# EAGLE board order2 (EAGLE 5.06), part 1 of 3
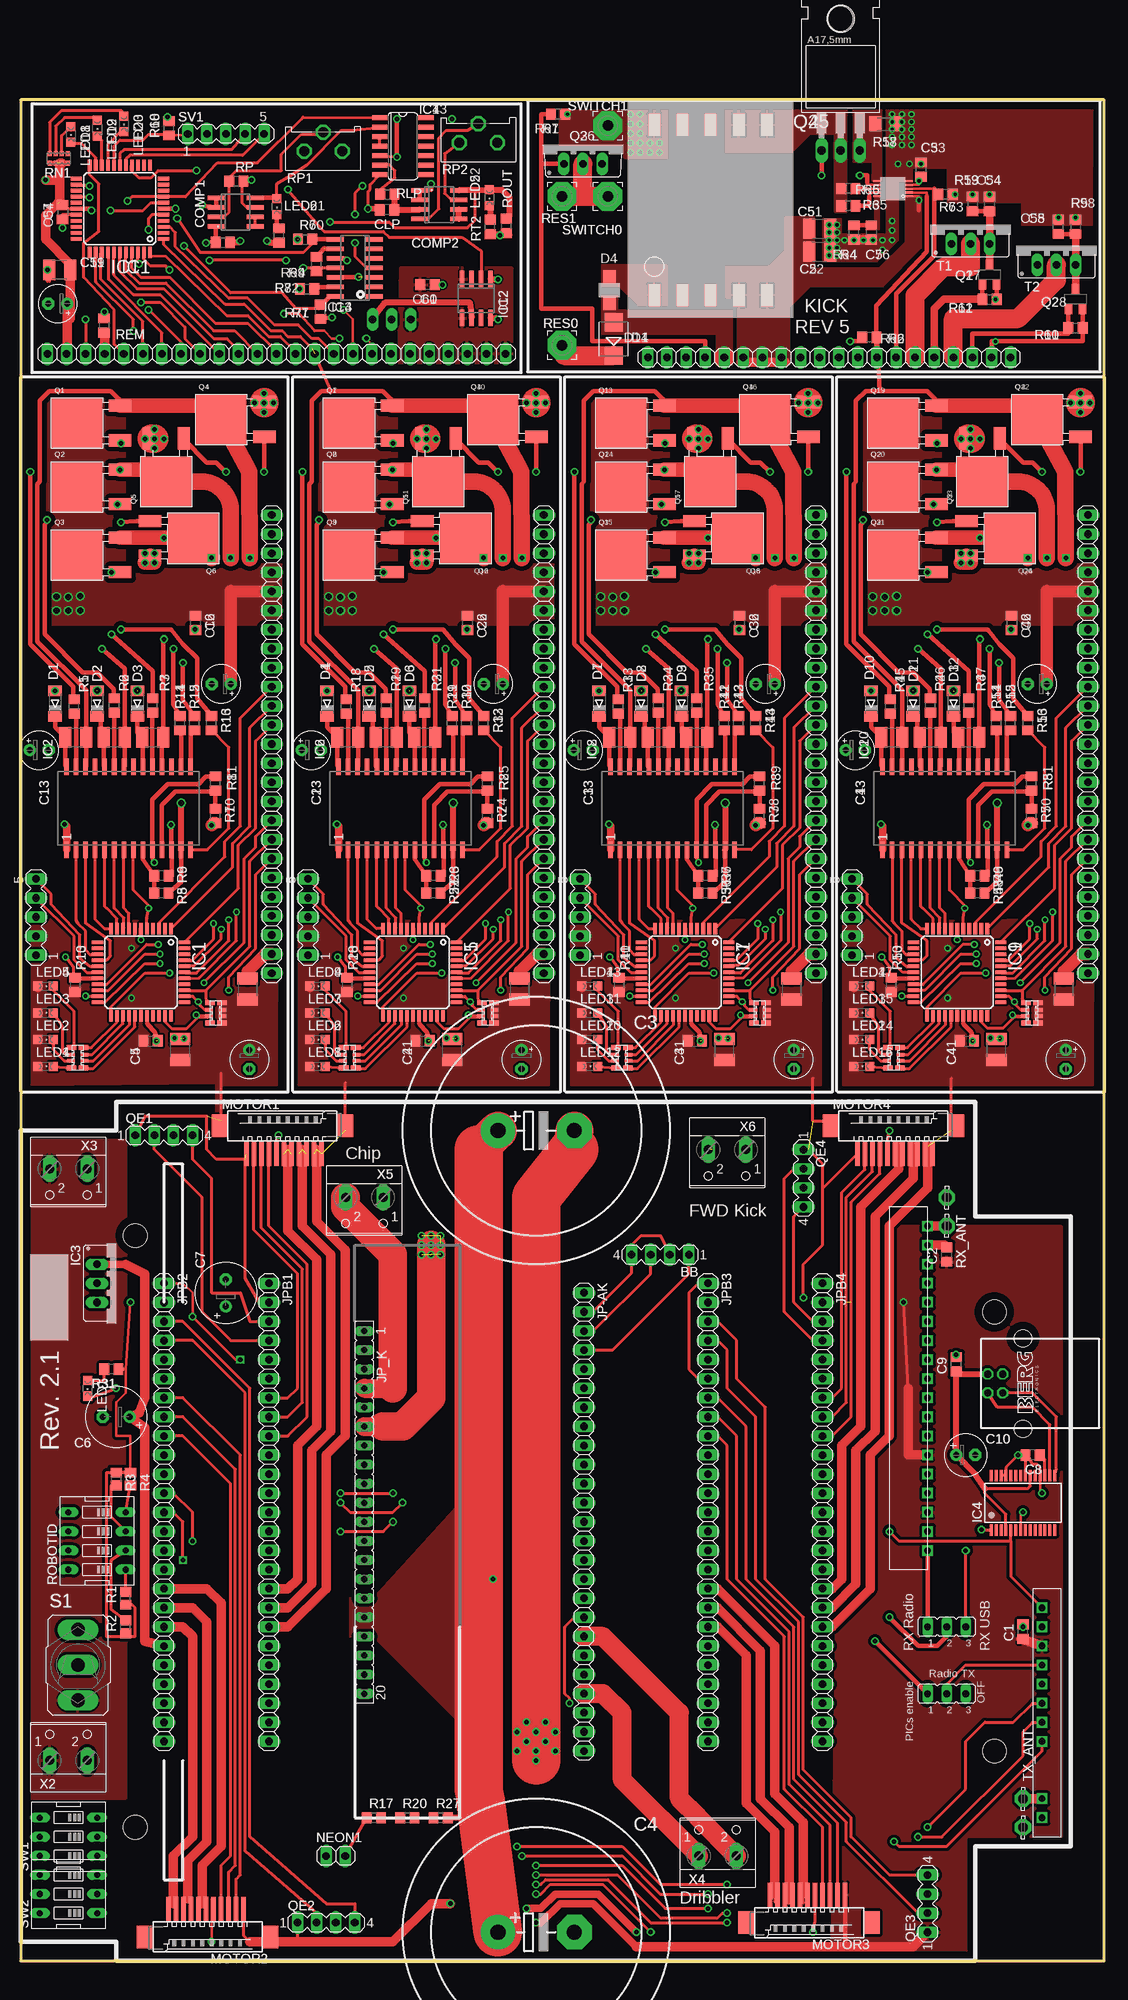
[diagram p0: board, top side]
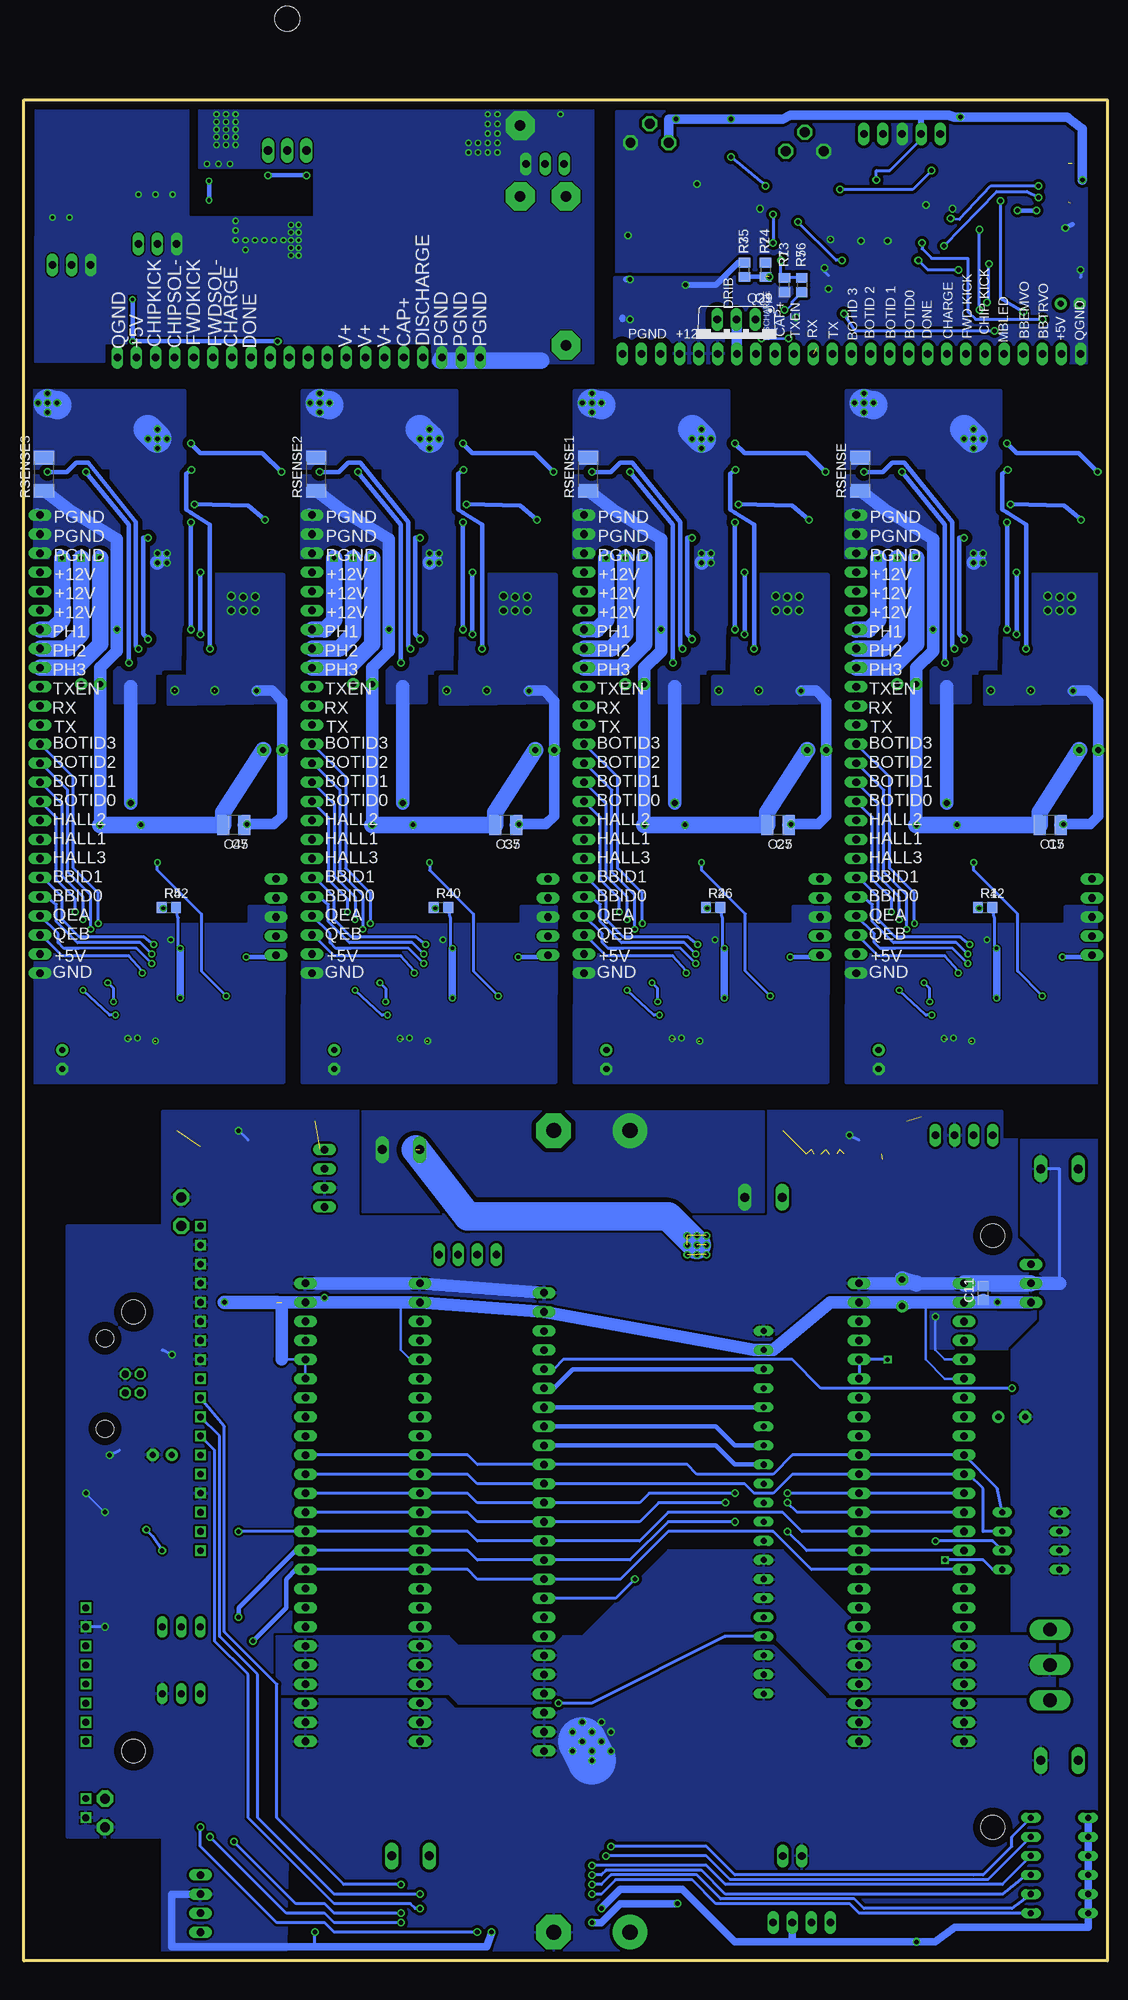
[diagram p1: board, bottom side, seen from below]

Size 144.15 x 247.65 mm. Coordinates in mm from the lower left corner, seen from the top.
Outline: 0,0 144.15,0 144.15,247.65 0,247.65 0,0
Copper layers (1*16): Top 0.035mm / dielectric 1.5mm / Bottom 0.035mm
Design rules "default": minimum track width 10mil, minimum drill 24mil, track to track 8mil, track to pad 8mil, pad to pad 8mil, via to via 8mil, smd to smd 8mil, copper to edge 40mil, drill to drill 8mil, minimum pad ring 10mil, minimum via ring 8mil, stop-mask expansion 4mil, vias tented up to drill 0mil, thermal gap 10mil
Holes 3.17 mm at 129.54,86.36 129.54,27.94 15.24,17.78 15.24,96.52

## Footprints (pad centres in the part's own frame; a part is rotated, then mirrored left to right if it is on the bottom)
MA04-1 = drill 1.016 long: 1 -3.81,0; 2 -1.27,0; 3 1.27,0; 4 3.81,0
C0805 = smd 1.3 x 1.5: 1 -0.95,0; 2 0.95,0
EB35D = drill 2.007 pad 4.597 round: + -5.08,0 | drill 2.007 pad 4.597 octagon: - 5.08,0
E3,5-8 = drill 0.813 pad 1.6 round: + -1.778,0 | drill 0.813 pad 1.6 octagon: - 1.778,0
E2,5-6 = drill 0.813 pad 1.6 round: + -1.27,0 | drill 0.813 pad 1.6 octagon: - 1.27,0
E2,5-5 = drill 0.813 pad 1.6 round: + -1.27,0 | drill 0.813 pad 1.6 octagon: - 1.27,0
C1210 = smd 1.6 x 2.7: 1 -1.4,0; 2 1.4,0
SOIC8 = smd 0.6 x 2.2: 1 -1.905,-2.6; 2 -0.635,-2.6; 3 0.635,-2.6; 4 1.905,-2.6; 5 1.905,2.6; 6 0.635,2.6; 7 -0.635,2.6; 8 -1.905,2.6
MINIMELF = smd 1.4 x 1.8: A 1.7,0; C -1.7,0
SMA = smd 1.7 x 1.7: P$1 -1.79,0; P$2 1.79,0
SMB = smd 2.4 x 2.4: A 2.2,0; C -2.2,0
TQFP44@1 = smd 1.5 x 0.5: 1 -5.8,4; 2 -5.8,3.2; 3 -5.8,2.4; 4 -5.8,1.6; 5 -5.8,0.8; 6 -5.8,0; 7 -5.8,-0.8; 8 -5.8,-1.6; 9 -5.8,-2.4; 10 -5.8,-3.2; 11 -5.8,-4; 23 5.8,-4; 24 5.8,-3.2; 25 5.8,-2.4; 26 5.8,-1.6; 27 5.8,-0.8; 28 5.8,0; 29 5.8,0.8; 30 5.8,1.6; 31 5.8,2.4; 32 5.8,3.2; 33 5.8,4 | smd 0.5 x 1.5: 12 -4,-5.8; 13 -3.2,-5.8; 14 -2.4,-5.8; 15 -1.6,-5.8; 16 -0.8,-5.8; 17 0,-5.8; 18 0.8,-5.8; 19 1.6,-5.8; 20 2.4,-5.8; 21 3.2,-5.8; 22 4,-5.8; 34 4,5.8; 35 3.2,5.8; 36 2.4,5.8; 37 1.6,5.8; 38 0.8,5.8; 39 0,5.8; 40 -0.8,5.8; 41 -1.6,5.8; 42 -2.4,5.8; 43 -3.2,5.8; 44 -4,5.8
SOP28 = smd 0.6 x 2.2: 1 -8.255,-5.5; 2 -6.985,-5.5; 3 -5.715,-5.5; 4 -4.445,-5.5; 5 -3.175,-5.5; 6 -1.905,-5.5; 7 -0.635,-5.5; 8 0.635,-5.5; 9 1.905,-5.5; 10 3.175,-5.5; 11 4.445,-5.5; 12 5.715,-5.5; 13 6.985,-5.5; 14 8.255,-5.5; 15 8.255,5.5; 16 6.985,5.5; 17 5.715,5.5; 18 4.445,5.5; 19 3.175,5.5; 20 1.905,5.5; 21 0.635,5.5; 22 -0.635,5.5; 23 -1.905,5.5; 24 -3.175,5.5; 25 -4.445,5.5; 26 -5.715,5.5; 27 -6.985,5.5; 28 -8.255,5.5
78XXS = drill 1.016 long: GND 0,-2.54; IN -2.54,-2.54; OUT 2.54,-2.54
SSOP28 = smd 0.4 x 1.5: 1 -4.225,-3.625; 2 -3.575,-3.625; 3 -2.925,-3.625; 4 -2.275,-3.625; 5 -1.625,-3.625; 6 -0.975,-3.625; 7 -0.325,-3.625; 8 0.325,-3.625; 9 0.975,-3.625; 10 1.625,-3.625; 11 2.275,-3.625; 12 2.925,-3.625; 13 3.575,-3.625; 14 4.225,-3.625; 15 4.225,3.625; 16 3.575,3.625; 17 2.925,3.625; 18 2.275,3.625; 19 1.625,3.625; 20 0.975,3.625; 21 0.325,3.625; 22 -0.325,3.625; 23 -0.975,3.625; 24 -1.625,3.625; 25 -2.275,3.625; 26 -2.925,3.625; 27 -3.575,3.625; 28 -4.225,3.625
SO-08 = smd 0.6 x 2.2: 1 -1.905,-2.6; 2 -0.635,-2.6; 3 0.635,-2.6; 4 1.905,-2.6; 5 1.905,2.6; 6 0.635,2.6; 7 -0.635,2.6; 8 -1.905,2.6
SO14 = smd 0.66 x 2.032: 1 -3.81,-3.073; 2 -2.54,-3.073; 3 -1.27,-3.073; 4 0,-3.073; 5 1.27,-3.073; 6 2.54,-3.073; 7 3.81,-3.073; 8 3.81,3.073; 9 2.54,3.073; 10 1.27,3.073; 11 0,3.073; 12 -1.27,3.073; 13 -2.54,3.073; 14 -3.81,3.073
SO14' = smd 0.6 x 2.2: 1 -3.81,-2.6; 2 -2.54,-2.6; 3 -1.27,-2.6; 4 0,-2.6; 5 1.27,-2.6; 6 2.54,-2.6; 7 3.81,-2.6; 8 3.81,2.6; 9 2.54,2.6; 10 1.27,2.6; 11 0,2.6; 12 -1.27,2.6; 13 -2.54,2.6; 14 -3.81,2.6
MA05-1 = drill 1.016 long: 1 -5.08,0; 2 -2.54,0; 3 0,0; 4 2.54,0; 5 5.08,0
JP2 = drill 0.914 long: 1 -2.54,0; 2 0,0; 3 2.54,0
1X25 = drill 1.016 long: 1 -29.21,0; 2 -26.67,0; 3 -24.13,0; 4 -21.59,0; 5 -19.05,0; 6 -16.51,0; 7 -13.97,0; 8 -11.43,0; 9 -8.89,0; 10 -6.35,0; 11 -3.81,0; 12 -1.27,0; 13 1.27,0; 14 3.81,0; 15 6.35,0; 16 8.89,0; 17 11.43,0; 18 13.97,0; 19 16.51,0; 20 19.05,0; 21 21.59,0; 22 24.13,0; 23 26.67,0; 24 29.21,0; 25 31.75,0
FE20 = drill 0.813 long: 1 -24.13,0; 2 -21.59,0; 3 -19.05,0; 4 -16.51,0; 5 -13.97,0; 6 -11.43,0; 7 -8.89,0; 8 -6.35,0; 9 -3.81,0; 10 -1.27,0; 11 1.27,0; 12 3.81,0; 13 6.35,0; 14 8.89,0; 15 11.43,0; 16 13.97,0; 17 16.51,0; 18 19.05,0; 19 21.59,0; 20 24.13,0
1X20 = drill 1.016 long: 1 -24.13,0; 2 -21.59,0; 3 -19.05,0; 4 -16.51,0; 5 -13.97,0; 6 -11.43,0; 7 -8.89,0; 8 -6.35,0; 9 -3.81,0; 10 -1.27,0; 11 1.27,0; 12 3.81,0; 13 6.35,0; 14 8.89,0; 15 11.43,0; 16 13.97,0; 17 16.51,0; 18 19.05,0; 19 21.59,0; 20 24.13,0
R3225 = smd 1.6 x 2.7: 1 -1.4,0; 2 1.4,0
CHIPLED_0805 = smd 1.2 x 1.2: A 0,-1.05; C 0,1.05
53261-11 = smd 0.6 x 3.2: P$1 -3,-3.1; P$2 -2,-3.1; P$3 -1,-3.1; P$4 0,-3.1; P$5 1,-3.1; P$6 2,-3.1; P$7 3,-3.1; P$8 4,-3.1; P$9 5,-3.1; P$10 6,-3.1; P$11 7,-3.1 | smd 2.1 x 3: S1 10.15,0.625; S2 -6.55,0.625
1X02 = drill 1.016 long: 1 -1.27,0; 2 1.27,0
DPAK = smd 6.7 x 6.7: DRAIN 0,0 | smd 3 x 1.6: GATE 5.75,-2.3; SOURCE 5.75,2.3
TO220 = drill 1.118 long: 1 -2.54,-6.35; 2 0,-6.35; 3 2.54,-6.35 | hole 3.302: 0,11.176
TO220BV = drill 1.016 long: D 0,-2.54; G -2.54,-2.54; S 2.54,-2.54
SOT23W = smd 1 x 1.4: 1 -0.95,-1.303; 2 0.95,-1.303; 3 0,1.303
R0805 = smd 1.3 x 1.5: 1 -0.85,0; 2 0.85,0
R0805' = smd 1.3 x 1.5: 1 -0.95,0; 2 0.95,0
M1206 = smd 1.6 x 2: 1 -1.4,0; 2 1.4,0
3,81/1,4 = drill 1.397 pad 3.81 octagon: 1 0,0
0603-ARC = smd 0.5 x 0.65: 1 -1.2,-0.625; 2 -0.4,-0.625; 3 0.4,-0.625; 4 1.2,-0.625; 5 1.2,0.625; 6 0.4,0.625; 7 -0.4,0.625; 8 -1.2,0.625
EDG-04 = drill 0.813 long: 1 -3.81,-3.81; 2 -1.27,-3.81; 3 1.27,-3.81; 4 3.81,-3.81; 5 3.81,3.81; 6 1.27,3.81; 7 -1.27,3.81; 8 -3.81,3.81
ECP10P = drill 1.321 octagon: A -2.54,0; E 2.54,0; S 0,2.54
R2010 = smd 1.8 x 2.7: 1 -2.2,0; 2 2.2,0
LSP13 = drill 1.321 pad 2.159 octagon: MP 0,0
M9040P = drill 1.803 long: 1 0,4.699; 2 0,0; 3 0,-4.699
EDG-03 = drill 0.813 long: 1 -2.54,-3.81; 2 0,-3.81; 3 2.54,-3.81; 4 2.54,3.81; 5 0,3.81; 6 -2.54,3.81
TO220CS = drill 1.016 long: A 0,-2.54; C -2.54,-2.54; G 2.54,-2.54
SIP-18 = drill 0.9 square: P$1 2.54,0; P$2 5.08,0; P$3 7.62,0; P$4 10.16,0; P$5 12.7,0; P$6 15.24,0; P$7 17.78,0; P$8 20.32,0; P$9 22.86,0; P$10 25.4,0; P$11 27.94,0; P$12 30.48,0; P$13 33.02,0; P$14 35.56,0; P$15 38.1,0; P$16 40.64,0; P$17 43.18,0; P$18 45.72,0
SIP-10 = drill 0.9 square: P$1 2.54,0; P$2 5.08,0; P$3 12.7,0; P$4 15.24,0; P$5 17.78,0; P$6 20.32,0; P$7 22.86,0; P$8 25.4,0; P$9 27.94,0; P$10 30.48,0
0603X4 = smd 0.508 x 1.016: P$1 1.2,-0.1; P$2 2,-0.1; P$3 2,1.7; P$4 1.2,1.7 | smd 0.635 x 1.27: P$5 0.25,0; P$6 0.25,1.6; P$7 2.95,0; P$8 2.95,1.6
10-MSOP = smd 0.97 x 0.31: P$1 -0.485,-0.155; P$2 -0.485,-0.655; P$3 -0.485,-1.155; P$4 -0.485,-1.655; P$5 -0.485,-2.155; P$6 3.785,-2.155; P$7 3.785,-1.655; P$8 3.785,-1.155; P$9 3.785,-0.655; P$10 3.785,-0.155
10-TRANSFORMER = smd 2.92 x 1.52: P$1 0,0; P$2 0,-3.75; P$3 0,-7.5; P$4 0,-11.25; P$5 0,-15; P$6 22.67,-15; P$7 22.67,-11.25; P$8 22.67,-7.5; P$9 22.67,-3.75; P$10 22.67,0
PN61729 = drill 0.95 octagon: 1 1.25,4.71; 2 -1.25,4.71; 3 -1.25,2.71; 4 1.25,2.71 | hole 2.3: -6.02,0; 6.02,0
W237-102 = drill 1.194 long: 1 -2.5,-1.27; 2 2.5,-1.27

## Placement (x,y rotation side)
BB  [MA04-1]  85.09,93.98 180 top
C1  [C0805]  133.35,43.81 90 top
C2  [C0805]  123.19,93.98 90 top
C3  [EB35D]  68.58,110.49 0 top
C4  [EB35D]  68.58,3.81 0 top
C5  0.1  [C0805]  17.29,122.44 0 top
C6  [E3,5-8]  12.7,72.39 180 top
C7  [E3,5-8]  27.3,88.9 90 top
C8  [C0805]  134.62,67.31 180 top
C9  [C0805]  124.46,79.38 90 top
C10  [E2,5-6]  125.73,67.31 0 top
C11  [C0805]  16.51,88.9 90 bottom
C12  0.1  [C0805]  23.24,178.06 270 top
C13  100uF  [E2,5-5]  2.45,161.1 0 top
C14  100uF  [E2,5-5]  30.43,119.95 270 top
C15  1uF  [C1210]  7.61,151.16 180 bottom
C16  1uF  [C1210]  21.23,121.27 90 top
C17  1uF  [C1210]  7.31,162.84 0 top
C18  1uF  [C1210]  12.43,162.84 0 top
C19  1uF  [C1210]  17.54,162.84 0 top
C20  100uF  [E2,5-5]  26.67,169.93 180 top
C21  0.1  [C0805]  53.49,122.44 0 top
C22  0.1  [C0805]  59.44,178.06 270 top
C23  100uF  [E2,5-5]  38.65,161.1 0 top
C24  100uF  [E2,5-5]  66.63,119.95 270 top
C25  1uF  [C1210]  43.81,151.16 180 bottom
C26  1uF  [C1210]  57.42,121.27 90 top
C27  1uF  [C1210]  43.5,162.84 0 top
C28  1uF  [C1210]  48.63,162.84 0 top
C29  1uF  [C1210]  53.74,162.84 0 top
C30  100uF  [E2,5-5]  62.87,169.93 180 top
C31  0.1  [C0805]  89.68,122.44 0 top
C32  0.1  [C0805]  95.63,178.06 270 top
C33  100uF  [E2,5-5]  74.84,161.1 0 top
C34  100uF  [E2,5-5]  102.82,119.95 270 top
C35  1uF  [C1210]  80,151.16 180 bottom
C36  1uF  [C1210]  93.62,121.27 90 top
C37  1uF  [C1210]  79.7,162.84 0 top
C38  1uF  [C1210]  84.82,162.84 0 top
C39  1uF  [C1210]  89.93,162.84 0 top
C40  100uF  [E2,5-5]  99.06,169.93 180 top
C41  0.1  [C0805]  125.88,122.44 0 top
C42  0.1  [C0805]  131.83,178.06 270 top
C43  100uF  [E2,5-5]  111.04,161.1 0 top
C44  100uF  [E2,5-5]  139.02,119.95 270 top
C45  1uF  [C1210]  116.2,151.16 180 bottom
C46  1uF  [C1210]  129.81,121.27 90 top
C47  1uF  [C1210]  115.89,162.84 0 top
C48  1uF  [C1210]  121.02,162.84 0 top
C49  1uF  [C1210]  126.13,162.84 0 top
C50  100uF  [E2,5-5]  135.25,169.93 180 top
C51  47uF  [C1210]  106.3,230.5 0 top
C52  47uF  [C1210]  106.3,227.46 0 top
C53  10uF  [C0805]  119.76,238.38 270 top
C54  .1uF  [C0805]  128.91,233.81 90 top
C55  .1uF  [C0805]  138.05,230.76 90 top
C56  100pF  [C0805]  113.16,230 270 top
C57  [C0805]  5.57,232.69 270 top
C58  100uF  [E2,5-5]  4.93,220.54 180 top
C59  1uF  [C1210]  5.19,225.02 180 top
C60  [C0805]  54.12,223.05 180 top
CLP  0.1 uF  [C0805]  48.73,233.02 180 top
COMP1  LTC1440  [SOIC8]  28.6,232.73 270 top
COMP2  LTC1440  [SOIC8]  55.68,233.7 270 top
D1  [MINIMELF]  4.57,167.31 90 top
D2  [MINIMELF]  10.16,167.31 90 top
D3  [MINIMELF]  15.53,167.31 90 top
D4  [MINIMELF]  40.77,167.31 90 top
D5  [MINIMELF]  46.35,167.31 90 top
D6  [MINIMELF]  51.72,167.31 90 top
D7  [MINIMELF]  76.96,167.31 90 top
D8  [MINIMELF]  82.55,167.31 90 top
D9  [MINIMELF]  87.92,167.31 90 top
D10  [MINIMELF]  113.16,167.31 90 top
D11  [MINIMELF]  118.75,167.31 90 top
D12  [MINIMELF]  124.11,167.31 90 top
D13  US1M  [SMA]  78.32,222.34 270 top
D14  ES2D  [SMB]  78.89,215.84 90 top
IC1  [TQFP44@1]  16,131.56 270 top
IC2  [SOP28]  14.35,153.38 0 top
IC3  [78XXS]  12.7,90.17 270 top
IC4  FT232RL  [SSOP28]  133.35,60.96 0 top
IC5  [TQFP44@1]  52.2,131.56 270 top
IC6  [SOP28]  50.55,153.38 0 top
IC7  [TQFP44@1]  88.39,131.56 270 top
IC8  [SOP28]  86.74,153.38 0 top
IC9  [TQFP44@1]  124.59,131.56 270 top
IC10  [SOP28]  122.94,153.38 0 top
IC11  [TQFP44@1]  13.2,233.16 180 top
IC12  MIC4429M  [SO-08]  60.63,221.21 180 top
IC13  74HC86D  [SO14]  50.83,241.48 270 top
IC14  LM324D  [SO14']  44.45,225.3 90 top
ICSP  [MA05-1]  2.03,138.91 90 top
ICSP1  [MA05-1]  38.23,138.91 90 top
ICSP2  [MA05-1]  74.42,138.91 90 top
ICSP3  [MA05-1]  110.62,138.91 90 top
JP1  [JP2]  123.19,44.45 0 top
JP2  [JP2]  123.19,35.56 0 top
JP3  [1X25]  33.4,160.66 90 top
JP4  [1X25]  69.6,160.66 90 top
JP5  [1X25]  105.79,160.66 90 top
JP6  [1X25]  141.99,160.66 90 top
JP7  [1X25]  32.77,213.87 0 top
JP-AK  [1X25]  74.93,59.69 270 top
JP_K  [FE20]  45.72,59.69 270 top
JPB1  [1X25]  33.02,60.96 270 top
JPB2  [1X25]  19.05,60.96 270 top
JPB3  [1X25]  91.44,60.96 270 top
JPB4  [1X25]  106.68,60.96 270 top
KICKER  [1X20]  107.57,213.36 180 top
L1  4.7uH  [R3225]  30.18,129.31 270 top
L2  4.7uH  [R3225]  66.37,129.31 270 top
L3  4.7uH  [R3225]  102.57,129.31 270 top
L4  4.7uH  [R3225]  138.76,129.31 270 top
LED1  [CHIPLED_0805]  8.89,76.2 180 top
LED2  [CHIPLED_0805]  3.3,122.59 270 top
LED3  [CHIPLED_0805]  3.3,126.14 270 top
LED4  [CHIPLED_0805]  3.3,119.03 270 top
LED5  [CHIPLED_0805]  3.3,129.7 270 top
LED6  [CHIPLED_0805]  39.5,122.59 270 top
LED7  [CHIPLED_0805]  39.5,126.14 270 top
LED8  [CHIPLED_0805]  39.5,119.03 270 top
LED9  [CHIPLED_0805]  39.5,129.7 270 top
LED10  [CHIPLED_0805]  75.69,122.59 270 top
LED11  [CHIPLED_0805]  75.69,126.14 270 top
LED12  [CHIPLED_0805]  75.69,119.03 270 top
LED13  [CHIPLED_0805]  75.69,129.7 270 top
LED14  [CHIPLED_0805]  111.89,122.59 270 top
LED15  [CHIPLED_0805]  111.89,126.14 270 top
LED16  [CHIPLED_0805]  111.89,119.03 270 top
LED17  [CHIPLED_0805]  111.89,129.7 270 top
LED18  [CHIPLED_0805]  6.68,243.06 180 top
LED19  [CHIPLED_0805]  10.19,243.9 180 top
LED20  [CHIPLED_0805]  13.73,244.45 180 top
LED21  [CHIPLED_0805]  34.07,233.45 180 top
LED22  [CHIPLED_0805]  62.37,234.64 180 top
MOTOR1  [53261-11]  33.02,110.49 0 top
MOTOR2  [53261-11]  26.67,3.81 180 top
MOTOR3  [53261-11]  106.68,5.71 180 top
MOTOR4  [53261-11]  114.3,110.49 0 top
NEON1  [1X02]  41.91,13.97 0 top
Q1  [DPAK]  7.49,204.64 0 top
Q2  [DPAK]  7.49,196.13 0 top
Q3  [DPAK]  7.49,187.08 0 top
Q4  [DPAK]  26.67,205.1 0 top
Q5  [DPAK]  19.37,196.85 90 top
Q6  [DPAK]  22.98,189.31 180 top
Q7  [DPAK]  43.69,204.64 0 top
Q8  [DPAK]  43.69,196.13 0 top
Q9  [DPAK]  43.69,187.08 0 top
Q10  [DPAK]  62.87,205.1 0 top
Q11  [DPAK]  55.56,196.85 90 top
Q12  [DPAK]  59.17,189.31 180 top
Q13  [DPAK]  79.88,204.64 0 top
Q14  [DPAK]  79.88,196.13 0 top
Q15  [DPAK]  79.88,187.08 0 top
Q16  [DPAK]  99.06,205.1 0 top
Q17  [DPAK]  91.76,196.85 90 top
Q18  [DPAK]  95.37,189.31 180 top
Q19  [DPAK]  116.08,204.64 0 top
Q20  [DPAK]  116.08,196.13 0 top
Q21  [DPAK]  116.08,187.08 0 top
Q22  [DPAK]  135.25,205.1 0 top
Q23  [DPAK]  127.95,196.85 90 top
Q24  [DPAK]  131.56,189.31 180 top
Q25  BUZ10  [TO220]  109.09,247.27 0 top
Q26  IRF520  [TO220BV]  74.8,241.68 0 top
Q27  [SOT23W]  128.91,224.41 0 top
Q28  [SOT23W]  140.34,221.11 0 top
Q29  IRF520  [TO220BV]  49.35,215.88 180 bottom
QE1  [MA04-1]  19.05,109.86 0 top
QE2  [MA04-1]  40.64,5.08 0 top
QE3  [MA04-1]  120.65,7.62 90 top
QE4  [MA04-1]  104.14,104.14 270 top
R1  7k  [R0805]  13.97,48.26 90 top
R2  [R0805]  13.97,44.45 90 top
R3  [R0805]  12.7,64.14 270 top
R4  [R0805]  14.61,64.14 270 top
R5  10  [R0805']  7.11,166.93 90 top
R6  10  [R0805']  12.45,167.05 90 top
R7  10  [R0805']  17.56,167.07 90 top
R8  [R0805']  18.7,142.11 0 top
R9  [R0805']  18.7,144.4 180 top
R10  [R0805']  25.91,152.37 90 top
R11  [R0805']  25.91,156.69 90 top
R12  10k  [R0805']  16.26,140.18 0 bottom
R13  [R0805']  7.22,129.88 270 top
R14  10  [R0805']  21.21,164.72 90 top
R15  10  [R0805']  23.11,164.72 90 top
R16  10  [R0805']  25.4,164.72 90 top
R17  [R0805']  46.99,19.05 0 top
R18  10  [R0805']  43.31,166.93 90 top
R19  10  [R0805']  48.64,167.05 90 top
R20  [R0805']  51.44,19.05 0 top
R21  10  [R0805']  53.75,167.07 90 top
R22  [R0805']  54.9,142.11 0 top
R23  [R0805']  54.9,144.4 180 top
R24  [R0805']  62.1,152.37 90 top
R25  [R0805']  62.1,156.69 90 top
R26  10k  [R0805']  52.45,140.18 0 bottom
R27  [R0805']  55.88,19.05 0 top
R28  [R0805']  43.42,129.88 270 top
R29  10  [R0805']  57.4,164.72 90 top
R30  10  [R0805']  59.31,164.72 90 top
R31  220  [R0805']  12.06,78.74 180 top
R32  10  [R0805']  61.59,164.72 90 top
R33  10  [R0805']  79.5,166.93 90 top
R34  10  [R0805']  84.84,167.05 90 top
R35  10  [R0805']  89.95,167.07 90 top
R36  [R0805']  91.09,142.11 0 top
R37  [R0805']  91.09,144.4 180 top
R38  [R0805']  98.3,152.37 90 top
R39  [R0805']  98.3,156.69 90 top
R40  10k  [R0805']  88.65,140.18 0 bottom
R41  [R0805']  79.61,129.88 270 top
R42  10  [R0805']  93.6,164.72 90 top
R43  10  [R0805']  95.5,164.72 90 top
R44  10  [R0805']  97.79,164.72 90 top
R45  10  [R0805']  115.7,166.93 90 top
R46  10  [R0805']  121.03,167.05 90 top
R47  10  [R0805']  126.14,167.07 90 top
R48  [R0805']  127.29,142.11 0 top
R49  [R0805']  127.29,144.4 180 top
R50  [R0805']  134.49,152.37 90 top
R51  [R0805']  134.49,156.69 90 top
R52  10k  [R0805']  124.84,140.18 0 bottom
R53  [R0805']  115.81,129.88 270 top
R54  10  [R0805']  129.79,164.72 90 top
R55  10  [R0805']  131.7,164.72 90 top
R56  10  [R0805']  133.99,164.72 90 top
R57  20m  [M1206]  115.08,244.47 180 top
R58  1k  [R0805']  140.34,230.76 270 top
R59  1k  [R0805']  126.62,233.81 270 top
R60  10k  [R0805']  140.34,217.3 0 top
R61  10k  [R0805']  128.91,221.11 0 top
R62  100k  [R0805']  112.9,216.03 180 top
R63  100k  [R0805']  123.06,235.08 180 top
R64  2.49k  [R0805']  110.87,230 90 top
R65  80.6k  [R0805']  110.11,233.55 180 top
R66  60.4k  [R0805']  110.11,235.84 180 top
R67  10k  [R0805']  71.5,245.75 180 top
R68  10K  [R0805']  19.71,243.88 90 top
R69  [R0805']  39.37,225.81 90 top
R70  [R0805']  37.85,229.11 0 top
R71  [R0805']  39.88,219.46 90 top
R72  [R0805']  38.1,222.5 0 top
R73  [R0805']  42.93,223.01 90 bottom
R74  [R0805']  45.47,225.04 270 bottom
R75  [R0805']  48.26,225.04 90 bottom
R76  [R0805']  40.64,223.01 270 bottom
REM  110  [R0805']  11.09,217.63 270 top
RES0  [3,81/1,4]  72.01,215.01 180 top
RES1  [3,81/1,4]  72.01,234.82 180 top
RLP  160K  [R0805']  48.79,235.09 0 top
RN1  220  [0603-ARC]  5.06,239.85 0 top
ROBOTID  [EDG-04]  10.16,55.88 90 top
ROUT  1K  [R0805']  64.61,230.88 90 top
RP  8.2K  [R0805']  28.69,236.84 0 top
RP1  [ECP10P]  40.25,240.8 0 top
RP2  [ECP10P]  60.89,241.97 0 top
RSENSE  [R2010]  32.86,197.84 90 bottom
RSENSE1  [R2010]  69.05,197.84 90 bottom
RSENSE2  [R2010]  105.25,197.84 90 bottom
RSENSE3  [R2010]  141.44,197.84 90 bottom
RT1  1K  [R0805']  34.36,229.61 90 top
RT2  1K  [R0805']  62.47,230.75 90 top
RTR  110  [R0805']  26.89,228.69 0 top
RX_ANT  LSP13  [LSP13]  123.19,97.79 270 top
RX_ANT1  LSP13  [LSP13]  123.19,101.6 90 top
S1  [M9040P]  7.62,39.37 0 top
SV1  [MA05-1]  27.3,243.13 0 top
SW1  [EDG-03]  6.35,16.51 90 top
SW2  [EDG-03]  6.35,8.89 90 top
SWITCH0  [3,81/1,4]  78.11,234.82 180 top
SWITCH1  [3,81/1,4]  78.11,244.22 180 top
T1  BTV58  [TO220CS]  126.36,231.01 0 top
T2  BTV58  [TO220CS]  137.79,228.22 0 top
TX_ANT  LSP13  [LSP13]  133.35,21.59 90 top
TX_ANT_GND  LSP13  [LSP13]  133.35,17.78 90 top
U$1  RXM-900-HP3-PPS  [SIP-18]  120.65,100.33 270 top
U$2  TXM-900-HP3-PPO  [SIP-10]  135.89,16.51 90 top
U$3  10K  [0603X4]  25.16,127.75 270 top
U$4  10k  [0603X4]  8.38,118.58 90 top
U$5  10K  [0603X4]  61.36,127.75 270 top
U$6  10k  [0603X4]  44.58,118.58 90 top
U$7  10K  [0603X4]  97.55,127.75 270 top
U$8  10k  [0603X4]  80.77,118.58 90 top
U$9  10K  [0603X4]  133.75,127.75 270 top
U$10  10k  [0603X4]  116.97,118.58 90 top
U$11  LT3750  [10-MSOP]  117.69,234.68 180 top
U$12  32052-TRANSFORMER  [10-TRANSFORMER]  84.3,221.66 90 top
X1  [PN61729]  133.35,76.83 90 top
X2  [W237-102]  6.35,27.94 0 top
X3  [W237-102]  6.35,104.14 180 top
X4  [W237-102]  92.71,15.24 0 top
X5  [W237-102]  45.72,100.33 180 top
X6  [W237-102]  93.98,106.68 180 top

## Library data of the parts
BB ICSP ICSP1-ICSP3 QE1-QE4 SV1 = con-lstb
C1-C60 CLP R5-R76 REM RLP ROUT RP RSENSE RSENSE1-RSENSE3 RT1 RT2 RTR = rcl
COMP1 COMP2 = mylib
D1-D12 D14 = diode
D13 U$11 U$12 = kickerchips
IC1 IC5 IC7 IC9 IC11 = microchip
IC2 IC6 IC8 IC10 Q25 = transistor-fet
IC3 = v-reg
IC4 = ftdichip
IC12 Q26 Q29 = transistor-power
IC13 = 74xx-eu
IC14 = linear
JP1 JP2 = jumper
JP3-JP7 JP-AK JPB1-JPB4 KICKER NEON1 = pinhead
JP_K = con-lsta
L1-L4 = resistor
LED1-LED22 = led
MOTOR1-MOTOR4 = brushless
Q1-Q24 U$1 U$2 U$4 U$6 U$8 U$10 = rfc
Q27 Q28 = semicon-smd-ipc
R1-R4 = quantum-sensor
RES0 RES1 SWITCH0 SWITCH1 = wirepad
RN1 = resistor-dil
ROBOTID SW1 SW2 = special
RP1 RP2 = pot
RX_ANT RX_ANT1 TX_ANT TX_ANT_GND = solpad
S1 = switch
T1 T2 = triac
U$3 U$5 U$7 U$9 = rfc; VALUE: 10k
X1 = con-berg
X2-X6 = con-wago-500

## Nets
+5MB: JP3.2 L1.1
+5MB1: JP4.2 L2.1
+5MB2: JP5.2 L3.1
+5MB3: JP6.2 L4.1
+5V2: C21.1 C24.+ C26.1 IC5.7 IC5.28 ICSP1.2 JPB1.19 L2.2 LED6.A LED7.A LED8.A LED9.A MOTOR1.P$10 MOTOR1.P$11 R26.2 R28.2 U$5.P$3 U$5.P$4 U$5.P$6 U$5.P$8
+5V3: BB.2 BB.4 C1.1 C2.1 C5.1 C7.+ C11.1 C14.+ C16.1 C31.1 C34.+ C36.1 IC1.7 IC1.28 IC3.OUT IC7.7 IC7.28 ICSP2.2 ICSP.2 JP-AK.2 JP_K.2 JPB1.2 JPB2.2 JPB2.6 JPB3.2 JPB3.5 JPB4.2 JPB4.5 JPB4.6 L1.2 L3.2 LED2.A LED3.A LED4.A LED5.A LED10.A LED11.A LED12.A LED13.A MOTOR1.P$1 MOTOR2.P$1 MOTOR3.P$1 MOTOR4.P$1 QE1.1 QE2.1 QE3.1 QE4.1 R1.1 R2.1 R3.1 R4.1 R12.2 R13.2 R31.1 R40.2 R41.2 U$1.P$13 U$1.P$16 U$2.P$8 U$3.P$3 U$3.P$4 U$3.P$6 U$3.P$8 U$7.P$3 U$7.P$4 U$7.P$6 U$7.P$8
+5V4: C41.1 C44.+ C46.1 IC9.7 IC9.28 ICSP3.2 JPB4.19 L4.2 LED14.A LED15.A LED16.A LED17.A MOTOR4.P$10 MOTOR4.P$11 R52.2 R53.2 U$9.P$3 U$9.P$4 U$9.P$6 U$9.P$8
+5V5: KICKER.2 Q27.2 Q28.2 R60.2 R61.2 R62.2
+5V6: C57.1 C58.+ C59.1 COMP1.7 COMP2.7 IC11.7 IC11.28 IC13.5 JP7.2 R68.2 RN1.1 RN1.2 RN1.3 RN1.4 RP2.A RP.2 SV1.2
+12V: C12.1 C13.+ C15.1 C20.+ D1.A D2.A D3.A IC2.1 JP3.20 JP3.21 JP3.22 Q1.DRAIN Q2.DRAIN Q3.DRAIN
+12V1: C22.1 C23.+ C25.1 C30.+ D4.A D5.A D6.A IC6.1 JP4.20 JP4.21 JP4.22 Q7.DRAIN Q8.DRAIN Q9.DRAIN
+12V2: C32.1 C33.+ C35.1 C40.+ D7.A D8.A D9.A IC8.1 JP5.20 JP5.21 JP5.22 Q13.DRAIN Q14.DRAIN Q15.DRAIN
+12V3: C42.1 C43.+ C45.1 C50.+ D10.A D11.A D12.A IC10.1 JP6.20 JP6.21 JP6.22 Q19.DRAIN Q20.DRAIN Q21.DRAIN
+12V4: C60.1 IC12.1 IC12.8 JP7.20 JP7.21 JP7.22 R75.2
BATT2+: S1.3 X2.1 X3.2
BATTV: IC11.26 IC14.14 R71.2
BBEMVO: BB.1 JP-AK.4
BBEMVO1: JP7.4 REM.2
BBFREQOUT: IC11.8 IC13.1 REM.1
BBID0: IC1.20 JP3.5
BBID1: IC1.19 JP3.6
BBID2: IC5.20 JP4.5
BBID3: IC5.19 JP4.6
BBID4: IC7.20 JP5.5
BBID5: IC7.19 JP5.6
BBID6: IC9.20 JP6.5
BBID7: IC9.19 JP6.6
BBOUT: COMP2.8 IC11.43 LED22.A ROUT.2
BBTRAMP: COMP1.8 IC13.2 LED21.A
BBTRVO: BB.3 JP-AK.3
BBTRVO1: COMP1.4 JP7.3 RTR.1
BOTID0: JP-AK.10 JPB1.10 JPB2.10 JPB3.10 JPB4.10 R4.2 ROBOTID.4
BOTID1: JP-AK.11 JPB1.11 JPB2.11 JPB3.11 JPB4.11 R3.2 ROBOTID.3
BOTID2: JP-AK.12 JPB1.12 JPB2.12 JPB3.12 JPB4.12 R2.2 ROBOTID.2
BOTID3: JP-AK.13 JPB1.13 JPB2.13 JPB3.13 JPB4.13 R1.2 ROBOTID.1
BOTID4: IC1.38 JP3.10
BOTID5: IC1.39 JP3.11
BOTID6: IC1.41 JP3.13
BOTID7: IC1.40 JP3.12
BOTID8: IC5.38 JP4.10
BOTID9: IC5.39 JP4.11
BOTID10: IC5.41 JP4.13
BOTID11: IC5.40 JP4.12
BOTID12: IC7.38 JP5.10
BOTID13: IC7.39 JP5.11
BOTID14: IC7.41 JP5.13
BOTID15: IC7.40 JP5.12
BOTID16: IC9.38 JP6.10
BOTID17: IC9.39 JP6.11
BOTID18: IC9.41 JP6.13
BOTID19: IC9.40 JP6.12
BOTID20: IC11.38 JP7.10
BOTID21: IC11.39 JP7.11
BOTID22: IC11.41 JP7.13
BOTID23: IC11.40 JP7.12
CA-: IC2.11 R10.2 R11.1
CA-1: IC6.11 R24.2 R25.1
CA-2: IC8.11 R38.2 R39.1
CA-3: IC10.11 R50.2 R51.1
CAO: IC1.21 IC2.10 R11.2
CAO1: IC5.21 IC6.10 R25.2
CAO2: IC7.21 IC8.10 R39.2
CAO3: IC9.21 IC10.10 R51.2
CAP+: C3.+ C4.+ JP-AK.17 JP_K.16 R27.2 X5.1 X6.1
CAP+1: D13.P$2 D14.A KICKER.16
CAP+2: JP7.17 R76.2
CAPV: IC11.24 IC14.8 R70.2
CHARGE: JP-AK.8 JP_K.7
CHARGE1: KICKER.7 R63.2 U$11.P$3
CHARGE2: IC11.5 JP7.8
CHIPKICK: JP-AK.6 JP_K.3
CHIPKICK1: KICKER.3 Q28.1 R60.1
CHIPKICK2: IC11.36 JP7.6
CHIPSOL-: JP_K.4 X5.2
CHIPSOL-1: KICKER.4 T2.A
CLP: CLP.1 COMP2.3 RLP.2
CSP: Q25.3 R57.2 U$11.P$6
DISCHARGE: JP-AK.18 JP_K.17
DISCHARGE1: KICKER.17 Q26.G R67.2
DISCHARGE2: IC11.35 JP7.18
DONE: JP-AK.9 JP_K.8
DONE1: KICKER.8 R62.1 U$11.P$2
DONE2: IC11.42 JP7.9
DRIB: JP7.19 Q29.D
DRIB-: JP-AK.19 X4.2
FAULT: IC1.5 IC2.8 R12.1
FAULT1: IC5.5 IC6.8 R26.1
FAULT2: IC7.5 IC8.8 R40.1
FAULT3: IC9.5 IC10.8 R52.1
FWDKICK: JP-AK.7 JP_K.5
FWDKICK1: KICKER.5 Q27.1 R61.1
FWDKICK2: IC11.37 JP7.7
FWDSOL-: JP_K.6 X6.2
FWDSOL-1: KICKER.6 T1.A
GND: C1.2 C2.2 C7.- C8.2 C9.2 C10.- C11.2 IC3.GND IC4.7 IC4.18 IC4.21 IC4.25 IC4.26 JP2.3 JP-AK.1 JP_K.1 JPB1.1 JPB1.5 JPB1.6 JPB2.1 JPB2.5 JPB3.1 JPB3.6 JPB4.1 MOTOR1.P$5 MOTOR2.P$5 MOTOR3.P$5 MOTOR4.P$5 QE1.3 QE2.3 QE3.3 QE4.3 RX_ANT1.MP SW1.4 SW1.5 SW1.6 SW2.4 SW2.5 SW2.6 TX_ANT_GND.MP U$1.P$2 U$1.P$3 U$1.P$4 U$1.P$5 U$1.P$6 U$1.P$7 U$1.P$8 U$1.P$15 U$2.P$1 U$2.P$9 X1.4
GND1: C5.2 C14.- C16.2 IC1.6 IC1.29 ICSP.3 JP3.1
GND2: C21.2 C24.- C26.2 IC5.6 IC5.29 ICSP1.3 JP4.1
GND3: C31.2 C34.- C36.2 IC7.6 IC7.29 ICSP2.3 JP5.1
GND4: C41.2 C44.- C46.2 IC9.6 IC9.29 ICSP3.3 JP6.1
GND5: C57.2 C58.- C59.2 CLP.2 COMP1.1 COMP1.2 COMP2.1 COMP2.2 IC11.6 IC11.29 IC13.7 JP7.1 R69.1 R70.1 R71.1 R72.1 R73.1 ROUT.1 RP1.A RP2.E RT1.1 RT2.1 RTR.2 SV1.3
H1: IC1.14 IC2.2
H2: IC1.15 IC2.3
H3: IC1.11 IC2.4
H4: IC5.14 IC6.2
H5: IC5.15 IC6.3
H6: IC5.11 IC6.4
H7: IC7.14 IC8.2
H8: IC7.15 IC8.3
H9: IC7.11 IC8.4
H10: IC9.14 IC10.2
H11: IC9.15 IC10.3
H12: IC9.11 IC10.4
HALL1: IC1.36 JP3.8 U$3.P$5
HALL2: IC1.35 JP3.9 U$3.P$1
HALL3: IC1.32 JP3.7 U$3.P$2
HALL4: IC5.36 JP4.8 U$5.P$5
HALL5: IC5.35 JP4.9 U$5.P$1
HALL6: IC5.32 JP4.7 U$5.P$2
HALL7: IC7.36 JP5.8 U$7.P$5
HALL8: IC7.35 JP5.9 U$7.P$1
HALL9: IC7.32 JP5.7 U$7.P$2
HALL10: IC9.36 JP6.8 U$9.P$5
HALL11: IC9.35 JP6.9 U$9.P$1
HALL12: IC9.32 JP6.7 U$9.P$2
ITRIP: IC2.9 R8.1 R9.2
ITRIP1: IC6.9 R22.1 R23.2
ITRIP2: IC8.9 R36.1 R37.2
ITRIP3: IC10.9 R48.1 R49.2
L1: IC1.10 IC2.5
L2: IC1.9 IC2.6
L3: IC1.8 IC2.7
L4: IC5.10 IC6.5
L5: IC5.9 IC6.6
L6: IC5.8 IC6.7
L7: IC7.10 IC8.5
L8: IC7.9 IC8.6
L9: IC7.8 IC8.7
L10: IC9.10 IC10.5
L11: IC9.9 IC10.6
L12: IC9.8 IC10.7
LED1: JP-AK.5 LED1.C
LED2: IC1.27 U$4.P$5
LED3: IC1.26 U$4.P$1
LED4: IC1.25 U$4.P$2
LED5: IC1.24 U$4.P$7
LED6: IC5.27 U$6.P$5
LED7: IC5.26 U$6.P$1
LED8: IC5.25 U$6.P$2
LED9: IC5.24 U$6.P$7
LED10: IC7.27 U$8.P$5
LED11: IC7.26 U$8.P$1
LED12: IC7.25 U$8.P$2
LED13: IC7.24 U$8.P$7
LED14: IC9.27 U$10.P$5
LED15: IC9.26 U$10.P$1
LED16: IC9.25 U$10.P$2
LED17: IC9.24 U$10.P$7
LED18: IC11.21 LED18.C
LED19: IC11.20 LED19.C
LED20: IC11.19 LED20.C
LEDF1: IC11.22 JP7.5
M1H1: JPB1.8 MOTOR1.P$3
M1H2: JPB1.9 MOTOR1.P$4
M1H3: JPB1.7 MOTOR1.P$2
M1P2: JPB1.18 MOTOR1.P$8 MOTOR1.P$9
M1P3: JPB1.17 MOTOR1.P$6 MOTOR1.P$7
M2H1: JPB2.8 MOTOR2.P$3
M2H2: JPB2.9 MOTOR2.P$4
M2H3: JPB2.7 MOTOR2.P$2
M2P1: JPB2.19 MOTOR2.P$10 MOTOR2.P$11
M2P2: JPB2.18 MOTOR2.P$8 MOTOR2.P$9
M2P3: JPB2.17 MOTOR2.P$6 MOTOR2.P$7
M3H1: JPB3.8 MOTOR3.P$3
M3H2: JPB3.9 MOTOR3.P$4
M3H3: JPB3.7 MOTOR3.P$2
M3P1: JPB3.19 MOTOR3.P$10 MOTOR3.P$11
M3P2: JPB3.18 MOTOR3.P$8 MOTOR3.P$9
M3P3: JPB3.17 MOTOR3.P$6 MOTOR3.P$7
M4H1: JPB4.8 MOTOR4.P$3
M4H2: JPB4.9 MOTOR4.P$4
M4H3: JPB4.7 MOTOR4.P$2
M4P2: JPB4.18 MOTOR4.P$8 MOTOR4.P$9
M4P3: JPB4.17 MOTOR4.P$6 MOTOR4.P$7
N30: IC11.15 IC12.2
N$1: Q4.GATE R14.2
N$2: C9.1 C10.+ IC4.4 IC4.20 X1.1
N$3: LED1.A R31.2
N$4: C17.1 D1.C IC2.28
N$5: C18.1 D2.C IC2.24
N$6: IC2.15 R15.1
N$7: C19.1 D3.C IC2.20
N$8: Q5.GATE R15.2
N$9: Q6.GATE R16.2
N$10: IC2.23 R6.1
N$11: Q2.GATE R6.2
N$12: IC2.16 R14.1
N$13: RX_ANT.MP U$1.P$1
N$14: TX_ANT.MP U$2.P$2
N$15: IC2.14 R16.1
N$16: JP2.2 U$2.P$7
N$17: C8.1 IC4.17
N$18: IC4.15 X1.3
N$19: IC4.16 X1.2
N$20: Q3.GATE R7.2
N$21: R17.2 R20.1
N$22: IC2.19 R7.1
N$23: IC1.18 ICSP.1 R13.1
N$24: IC1.17 ICSP.4
N$25: IC1.16 ICSP.5
N$26: IC2.27 R5.1
N$27: R20.2 R27.1
N$28: Q1.GATE R5.2
N$29: LED4.C U$4.P$6
N$30: LED2.C U$4.P$4
N$31: NEON1.2 R17.1
N$32: LED3.C U$4.P$3
N$33: LED5.C U$4.P$8
N$34: C27.1 D4.C IC6.28
N$35: C28.1 D5.C IC6.24
N$36: C29.1 D6.C IC6.20
N$37: IC6.16 R29.1
N$38: Q10.GATE R29.2
N$39: IC6.15 R30.1
N$40: IC6.14 R32.1
N$41: Q11.GATE R30.2
N$42: Q12.GATE R32.2
N$43: IC6.23 R19.1
N$44: Q8.GATE R19.2
N$45: Q9.GATE R21.2
N$46: IC6.19 R21.1
N$47: IC5.18 ICSP1.1 R28.1
N$48: IC5.17 ICSP1.4
N$49: IC5.16 ICSP1.5
N$50: IC6.27 R18.1
N$51: Q7.GATE R18.2
N$52: LED8.C U$6.P$6
N$53: LED6.C U$6.P$4
N$54: LED7.C U$6.P$3
N$55: LED9.C U$6.P$8
N$56: C37.1 D7.C IC8.28
N$57: C38.1 D8.C IC8.24
N$58: C39.1 D9.C IC8.20
N$59: IC8.16 R42.1
N$60: Q16.GATE R42.2
N$61: IC8.15 R43.1
N$62: IC8.14 R44.1
N$63: Q17.GATE R43.2
N$64: Q18.GATE R44.2
N$65: IC8.23 R34.1
N$66: Q14.GATE R34.2
N$67: Q15.GATE R35.2
N$68: IC8.19 R35.1
N$69: IC7.18 ICSP2.1 R41.1
N$70: IC7.17 ICSP2.4
N$71: IC7.16 ICSP2.5
N$72: IC8.27 R33.1
N$73: Q13.GATE R33.2
N$74: LED12.C U$8.P$6
N$75: LED10.C U$8.P$4
N$76: LED11.C U$8.P$3
N$77: LED13.C U$8.P$8
N$78: C47.1 D10.C IC10.28
N$79: C48.1 D11.C IC10.24
N$80: C49.1 D12.C IC10.20
N$81: IC10.16 R54.1
N$82: Q22.GATE R54.2
N$83: IC10.15 R55.1
N$84: IC10.14 R56.1
N$85: Q23.GATE R55.2
N$86: Q24.GATE R56.2
N$87: IC10.23 R46.1
N$88: Q20.GATE R46.2
N$89: Q21.GATE R47.2
N$90: IC10.19 R47.1
N$91: IC9.18 ICSP3.1 R53.1
N$92: IC9.17 ICSP3.4
N$93: IC9.16 ICSP3.5
N$94: IC10.27 R45.1
N$95: Q19.GATE R45.2
N$96: LED16.C U$10.P$6
N$97: LED14.C U$10.P$4
N$98: LED15.C U$10.P$3
N$99: LED17.C U$10.P$8
N$100: C54.1 Q27.3 R59.2 T1.G
N$101: C55.1 Q28.3 R58.2 T2.G
N$102: Q26.D RES1.1 SWITCH0.1
N$103: C56.1 R64.2 U$11.P$10
N$104: Q25.2 R65.2 R66.2 U$12.P$6 U$12.P$7
N$105: Q25.1 U$11.P$7
N$106: D14.C RES0.1
N$107: D13.P$1 U$12.P$1
N$108: R65.1 U$11.P$9
N$109: R66.1 U$11.P$8
N$110: IC11.18 R68.1 SV1.1
N$111: IC11.17 SV1.4
N$112: IC11.16 SV1.5
N$113: IC12.6 Q29.G
N$114: IC13.6 RLP.1
N$115: IC13.3 IC13.4
N$116: COMP1.3 RP1.S RP.1
N$117: COMP1.5 COMP1.6
N$118: COMP2.4 RP2.S
N$119: COMP2.5 COMP2.6
N$120: LED22.C RT2.2
N$121: LED21.C RT1.2
N$122: IC14.9 R69.2
N$123: IC14.13 R72.2
N$124: LED20.A RN1.8
N$125: LED19.A RN1.7
N$126: LED18.A RN1.6
N$127: IC14.10 R73.2 R76.1
N$128: IC14.12 R74.2 R75.1
PE: C3.- C4.- C6.- JP-AK.23 JP-AK.24 JP-AK.25 JP_K.18 JP_K.19 JP_K.20 JPB1.23 JPB1.24 JPB1.25 JPB2.23 JPB2.24 JPB2.25 JPB3.23 JPB3.24 JPB3.25 JPB4.23 JPB4.24 JPB4.25 NEON1.1 ROBOTID.5 ROBOTID.6 ROBOTID.7 ROBOTID.8 X2.2 X3.1
PE1: C12.2 C13.- C15.2 C20.- IC2.12 JP3.23 JP3.24 JP3.25 R9.1 R10.1 RSENSE.1
PE2: C22.2 C23.- C25.2 C30.- IC6.12 JP4.23 JP4.24 JP4.25 R23.1 R24.1 RSENSE1.1
PE3: C32.2 C33.- C35.2 C40.- IC8.12 JP5.23 JP5.24 JP5.25 R37.1 R38.1 RSENSE2.1
PE4: C42.2 C43.- C45.2 C50.- IC10.12 JP6.23 JP6.24 JP6.25 R49.1 R50.1 RSENSE3.1
PE5: C51.2 C52.2 C53.1 C54.2 C55.2 C56.2 KICKER.18 KICKER.19 KICKER.20 Q26.S R57.1 R58.1 R59.1 R63.1 R64.1 R67.1 SWITCH1.1 T1.C T2.C U$11.P$5 U$12.P$10
PE6: C60.2 IC12.4 IC12.5 JP7.23 JP7.24 JP7.25 Q29.S
PH1: C17.2 IC2.26 JP3.19 Q1.SOURCE Q4.DRAIN
PH2: C18.2 IC2.22 JP3.18 Q2.SOURCE Q5.DRAIN
PH3: C19.2 IC2.18 JP3.17 Q3.SOURCE Q6.DRAIN
PH4: C27.2 IC6.26 JP4.19 Q7.SOURCE Q10.DRAIN
PH5: C28.2 IC6.22 JP4.18 Q8.SOURCE Q11.DRAIN
PH6: C29.2 IC6.18 JP4.17 Q9.SOURCE Q12.DRAIN
PH7: C37.2 IC8.26 JP5.19 Q13.SOURCE Q16.DRAIN
PH8: C38.2 IC8.22 JP5.18 Q14.SOURCE Q17.DRAIN
PH9: C39.2 IC8.18 JP5.17 Q15.SOURCE Q18.DRAIN
PH10: C47.2 IC10.26 JP6.19 Q19.SOURCE Q22.DRAIN
PH11: C48.2 IC10.22 JP6.18 Q20.SOURCE Q23.DRAIN
PH12: C49.2 IC10.18 JP6.17 Q21.SOURCE Q24.DRAIN
QEA: IC1.22 JP3.4
QEA1: JPB1.4 QE1.2
QEA2: JPB2.4 QE2.2
QEA3: JPB3.4 QE3.2
QEA4: JPB4.4 QE4.2
QEA5: IC5.22 JP4.4
QEA6: IC7.22 JP5.4
QEA7: IC9.22 JP6.4
QEB: IC1.23 JP3.3
QEB1: JPB1.3 QE1.4
QEB2: JPB2.3 QE2.4
QEB3: JPB3.3 QE3.4
QEB4: JPB4.3 QE4.4
QEB5: IC5.23 JP4.3
QEB6: IC7.23 JP5.3
QEB7: IC9.23 JP6.3
RADIORX: JP1.1 U$1.P$18
RX: JP1.2 JP-AK.15 JPB1.15 JPB2.15 JPB3.15 JPB4.15
RX1: IC1.1 JP3.15
RX2: IC5.1 JP4.15
RX3: IC7.1 JP5.15
RX4: IC9.1 JP6.15
RX5: IC11.1 JP7.15
RXCS0: SW1.3 U$1.P$10
RXCS1: SW1.2 U$1.P$11
RXCS2: SW1.1 U$1.P$12
TX: IC4.5 JP-AK.14 JPB1.14 JPB2.14 JPB3.14 JPB4.14 U$2.P$10
TX1: IC1.44 JP3.14
TX2: IC5.44 JP4.14
TX3: IC7.44 JP5.14
TX4: IC9.44 JP6.14
TX5: IC11.44 JP7.14
TXCS0: SW2.3 U$2.P$3
TXCS1: SW2.2 U$2.P$4
TXCS2: SW2.1 U$2.P$5
TXEN: JP2.1 JP-AK.16 JPB1.16 JPB2.16 JPB3.16 JPB4.16
TXEN1: IC1.3 JP3.16
TXEN2: IC5.3 JP4.16
TXEN3: IC7.3 JP5.16
TXEN4: IC9.3 JP6.16
TXEN5: IC11.3 JP7.16
USBRX: IC4.1 JP1.3
V+: C6.+ IC3.IN JP-AK.20 JP-AK.21 JP-AK.22 JP_K.13 JP_K.14 JP_K.15 JPB1.20 JPB1.21 JPB1.22 JPB2.20 JPB2.21 JPB2.22 JPB3.20 JPB3.21 JPB3.22 JPB4.20 JPB4.21 JPB4.22 S1.2 X4.1
V+1: C51.1 C52.1 C53.2 KICKER.13 KICKER.14 KICKER.15 U$11.P$1 U$11.P$4 U$12.P$4 U$12.P$5
V+2: IC14.4
V-: IC14.11
VCC: IC13.14
VSO: IC2.13 Q4.SOURCE Q5.SOURCE Q6.SOURCE R8.2 RSENSE.2
VSO1: IC6.13 Q10.SOURCE Q11.SOURCE Q12.SOURCE R22.2 RSENSE1.2
VSO2: IC8.13 Q16.SOURCE Q17.SOURCE Q18.SOURCE R36.2 RSENSE2.2
VSO3: IC10.13 Q22.SOURCE Q23.SOURCE Q24.SOURCE R48.2 RSENSE3.2

## Tracks (layer width: path | path; a pad name or v marks a point on that pad's centre or on a via)
+5MB
  Top 1.676: L1.1 30.18,131.65 32.51,133.99 JP3.2
+5MB1
  Top 1.676: L2.1 66.37,131.65 68.71,133.99 JP4.2
+5MB2
  Top 1.676: L3.1 102.57,131.65 104.9,133.99 JP5.2
+5MB3
  Top 1.676: L4.1 138.76,131.65 141.1,133.99 JP6.2
+5V2  (via drill 0.5)  (3 unrouted)
  Top 0.406: 43.18,110.49 43.18,116.84
  Top 1.27: 38.45,129.5 LED9.A | JPB1.19 35.56,44.45 40.64,49.53 40.64,67.31 43.18,69.85 43.18,94.61 39.37,98.42 39.37,107.95
  Bottom 0.406: R26.2 51.25,138.88 51.18,138.81 51.18,135 v50.93,134.75
  Bottom 1.016: v50.93,128.14 v50.93,134.75
  pour Top (isolate 0.305, no thermals): 37.02,140.08 37.02,116.59 70.23,116.59 70.29,138.62 41.78,138.3 41.78,140.34 41.27,140.34
+5V3  (via drill 0.5, 0.6, 0.6 pad 0.61)  (4 unrouted)
  Top 0.305: R4.1 14.61,69.85 12.7,69.85 12.7,74.3 13.97,75.56 13.97,78.74 v14.61,87.63
  Top 0.406: JP-AK.2 75.03,86.46 76.19,86.46 81.28,91.55 BB.4 81.28,95.25 82.55,96.52 85.09,96.52 BB.2 | 106.73,102.82 106.68,101.5 106.68,95.25 104.14,92.71 v104.14,88.27 | 106.73,102.82 MOTOR4.P$1 | 106.73,102.82 106.68,104.14 106.68,106.05 104.78,107.95 QE4.1 | QE1.1 16.51,112.39 24.77,112.39 24.77,107.95 26.04,106.68 29.84,106.68 29.84,90.81 31.75,87.63 JPB1.2 | R3.1 R4.1 11.43,64.98 11.43,43.18 13.76,43.18 R2.1 | MOTOR2.P$1 29.67,3.35 30.48,2.54 | 36.83,2.54 QE2.1 | 118.11,76.2 v117.47,87.63 | 13.97,78.74 R31.1 | R2.1 13.97,44.03 | R1.1 14.82,47.41 15.24,46.99 15.24,43.18 14.19,43.18 R2.1 | 26.67,110.49 27.3,110.49 27.3,111.76 26.67,111.76 26.67,118.11 | 107.95,111.76 105.41,111.76 105.41,117.47
  Top 0.61: MOTOR3.P$1 109.68,2.37 109.22,1.91
  Top 1.016: 81.92,1.91 76.2,7.62 71.75,7.62 69.22,5.08 v68.58,5.08
  Top 1.27: 74.64,129.5 LED13.A | 2.25,129.5 LED5.A | 30.48,2.54 36.83,2.54 49.53,2.54 54.61,7.62 v57.15,7.62 | QE3.1 118.75,1.91 109.22,1.91 81.92,1.91 | U$2.P$8 133.03,42.87 C1.1 | 118.11,76.2 118.11,67.31 U$1.P$13
  Bottom 0.305: 109.86,80.01 JPB4.5 JPB4.6 | JPB3.5 92.71,80.01 93.98,81.28 93.98,87.63 | JPB2.6 21.59,77.47 24.13,80.01 24.13,87.63
  Bottom 0.406: R40.2 87.44,138.88 87.38,138.81 87.38,135 v87.12,134.75 | R12.2 15.05,138.88 14.99,138.81 14.99,135 v14.73,134.75 | v104.14,88.27 104.78,88.27 105.41,87.63
  Bottom 1.016: v87.12,128.14 v87.12,134.75 | v14.73,128.14 v14.73,134.75 | v57.15,7.62 64.77,7.62 67.31,5.08 v68.58,5.08
  Bottom 1.27: 25.4,87.63 C7.+
  Bottom 1.676: 109.86,80.01 109.86,87.63 JPB4.2 105.41,87.63 93.98,87.63 JPB3.2 JP-AK.2 46.99,81.28 JP_K.2 44.45,81.28 36.83,87.63 JPB1.2 25.4,87.63 24.13,87.63 JPB2.2 16.51,87.63 | 16.51,87.63 v14.61,87.63 IC3.OUT | 16.51,87.63 C11.1
  Bottom 1.778: v117.47,87.63 110.49,87.63
  pour Top (isolate 0.305, no thermals): 73.22,140.08 73.22,116.59 106.43,116.59 106.49,138.62 77.98,138.3 77.98,140.34 77.47,140.34
  pour Top (isolate 0.305, no thermals): 0.83,140.08 0.83,116.59 26.04,116.84 26.04,111.76 26.67,111.76 26.67,116.59 34.04,116.59 34.1,138.62 5.59,138.3 5.59,140.34 5.08,140.34
  pour Top (isolate 0.406): 109.22,97.79 138.43,97.79 138.43,16.51 125.73,16.51 125.73,1.27 107.95,1.27
+5V4  (via drill 0.5)  (1 unrouted)
  Top 0.406: 120.65,108.38 MOTOR4.P$10 | 120.65,108.38 120.95,106.47 MOTOR4.P$11 | 120.65,108.38 120.65,106.68 | 124.46,110.49 123.83,110.49 123.83,117.47
  Top 1.27: 110.84,129.5 LED17.A | JPB4.19 107.95,44.45 113.03,49.53 113.03,67.31 115.57,69.85 115.57,97.79 120.65,102.87 120.65,108.38
  Bottom 0.406: R52.2 123.64,138.88 123.57,138.81 123.57,135 v123.32,134.75
  Bottom 1.016: v123.32,134.75 v123.32,128.14
  pour Top (isolate 0.305, no thermals): 109.41,140.08 109.41,116.59 142.62,116.59 142.68,138.62 114.17,138.3 114.17,140.34 113.67,140.34
+5V5  (via drill 0.46, 0.6)
  Top 0.61: R60.2 Q28.2 141.28,215.52 v129.67,215.52 129.16,215.52 KICKER.2 | Q27.2 R61.2 v129.67,221.11 | R62.2 111.95,215.52 v110.36,215.52
  Bottom 0.61: v129.67,221.11 v129.67,215.52 110.87,215.52 v110.36,215.52
+5V6  (via drill 0.6)  (2 unrouted)
  Top 0.406: IC11.28 5.57,233.16 C57.1 | R68.2 19.71,245.01 | COMP1.7 30.04,233.36 29.46,233.93 29.46,236.67 RP.2 30.59,236.84 v30.73,236.98 | COMP2.7 57.25,234.34 56.39,235.2 56.39,240.51 RP2.A | v11.94,232.92 16.26,232.92 17.3,233.96 IC11.7 | 47.94,240.21 47.06,240.21 v50.04,240.03 | v45.47,236.22 44.45,235.2 v44.45,232.41 | v44.45,228.6 44.45,226.82 45.97,225.3 47.5,225.3
  Top 0.61: 5.18,239.23 RN1.1 | RN1.3 RN1.4 | 47.94,240.21 IC13.5 | v9.4,232.92 9.16,233.16 IC11.28 | v50.04,245.11 v50.04,240.03 | R68.2 19.56,244.86 v19.56,245.36
  Top 1.27: JP7.2 6.2,213.87 C58.+ 6.59,218.5 C59.1 6.59,225.82 3.3,229.11 3.3,232.29 4.95,233.93 | C57.1 5.18,234.03 5.18,239.23 | 5.18,239.23 RN1.3 | 5.18,239.23 5.18,236.98 v3.3,236.98
  Bottom 0.406: v50.04,240.03 v45.47,236.22 | v44.45,232.41 v44.45,228.6 | v30.73,236.98 30.73,238.25 28.96,238.25 24.76,242.44 SV1.2
  Bottom 0.61: v9.4,232.92 v11.94,232.92
  Bottom 0.813: SV1.2 24.76,245.24 24.38,245.62
  Bottom 1.27: v3.3,236.98 3.3,243.84 5.33,245.36 v19.56,245.36 20.32,245.36 21.08,245.62 24.38,245.62 42.16,245.62 43.18,245.11 v50.04,245.11 v57.4,245.11 58.35,245.11 RP2.A
+12V  (via drill 0.6, 0.8)  (2 unrouted)
  Top 1.016: IC2.1 6.1,151.02 v5.86,151.26
  Top 1.676: C20.+ 27.94,182.28 JP3.21
  Bottom 1.422: v5.86,151.26 2.29,151.26 1.18,152.36 C13.+ 1.18,167.68 2.54,169.04 4.54,169.04 D1.A
  Bottom 1.778: v5.86,151.26 C15.1
  other vias: 6.35,179.71 6.35,181.48 7.94,179.71 4.76,179.71 4.76,181.55 7.94,181.61 10.16,169.04 15.49,169.04 4.57,169
  pour Bottom (isolate 0.406, rank 3, no thermals): 1.27,167.51 16.26,167.26 16.26,170.81 13.72,170.81 13.46,184.4 1.02,184.4 1.02,167.77
  pour Top (isolate 0.61, no thermals): 3.68,208.66 13.72,208.66 13.72,186.31 34.54,186.31 34.54,177.93 3.68,177.93
+12V1  (via drill 0.6, 0.8)  (2 unrouted)
  Top 1.016: IC6.1 42.29,151.02 v42.05,151.26
  Top 1.676: C30.+ 64.14,182.28 JP4.21
  Bottom 1.422: v42.05,151.26 38.48,151.26 37.38,152.36 C23.+ 37.38,167.68 38.73,169.04 40.73,169.04 D4.A
  Bottom 1.778: v42.05,151.26 C25.1
  other vias: 42.55,179.71 42.55,181.48 44.13,179.71 40.96,179.71 40.96,181.55 44.13,181.61 46.35,169.04 51.69,169.04 40.77,169
  pour Bottom (isolate 0.406, rank 3, no thermals): 37.47,167.51 52.45,167.26 52.45,170.81 49.91,170.81 49.66,184.4 37.21,184.4 37.21,167.77
  pour Top (isolate 0.61, no thermals): 39.88,208.66 49.91,208.66 49.91,186.31 70.74,186.31 70.74,177.93 39.88,177.93
+12V2  (via drill 0.6, 0.8)  (2 unrouted)
  Top 1.016: IC8.1 78.49,151.02 v78.25,151.26
  Top 1.676: C40.+ 100.33,182.28 JP5.21
  Bottom 1.422: v78.25,151.26 74.68,151.26 73.57,152.36 C33.+ 73.57,167.68 74.93,169.04 76.93,169.04 D7.A
  Bottom 1.778: v78.25,151.26 C35.1
  other vias: 78.74,179.71 78.74,181.48 80.33,179.71 77.15,179.71 77.15,181.55 80.33,181.61 82.55,169.04 87.88,169.04 76.96,169
  pour Bottom (isolate 0.406, rank 3, no thermals): 73.66,167.51 88.65,167.26 88.65,170.81 86.11,170.81 85.85,184.4 73.41,184.4 73.41,167.77
  pour Top (isolate 0.61, no thermals): 76.07,208.66 86.11,208.66 86.11,186.31 106.93,186.31 106.93,177.93 76.07,177.93
+12V3  (via drill 0.6, 0.8)  (2 unrouted)
  Top 1.016: IC10.1 114.68,151.02 v114.44,151.26
  Top 1.676: C50.+ 136.53,182.28 JP6.21
  Bottom 1.422: v114.44,151.26 110.87,151.26 109.77,152.36 C43.+ 109.77,167.68 111.12,169.04 113.12,169.04 D10.A
  Bottom 1.778: v114.44,151.26 C45.1
  other vias: 114.94,179.71 114.94,181.48 116.52,179.71 113.35,179.71 113.35,181.55 116.52,181.61 118.75,169.04 124.08,169.04 113.16,169
  pour Bottom (isolate 0.406, rank 3, no thermals): 109.86,167.51 124.84,167.26 124.84,170.81 122.3,170.81 122.05,184.4 109.6,184.4 109.6,167.77
  pour Top (isolate 0.61, no thermals): 112.27,208.66 122.3,208.66 122.3,186.31 143.13,186.31 143.13,177.93 112.27,177.93
+12V4  (via drill 0.6)
  Top 0.813: IC12.8 63.25,218.61 v63.5,218.44 | IC12.1 63.5,223.81 v63.5,223.77 | C60.1 56.09,223.05 v56.13,223.01
  Bottom 0.813: 64.52,218.44 64.52,218.69 | v63.5,223.77 64.01,223.77 | R75.2 49.09,225.99 51.05,224.03 52.07,223.01 v56.13,223.01
  pour Bottom (isolate 0.813): 50.55,212.6 65.53,212.6 65.53,224.03 50.55,224.03
BATT2+
  pour Top (isolate 0.406, rank 2): 1.27,109.22 13.97,109.22 13.97,21.59 1.27,21.59
BATTV  (via drill 0.6)
  Top 0.406: v9.14,234.7 7.46,234.7 IC11.26 | 39.62,219.96 36.58,219.96 34.8,222 27.94,222 v21.72,228.22
  Top 0.61: R71.2 39.62,219.96 41.15,221.49 IC14.14
  Bottom 0.406: v9.14,234.7 10.67,235.46 14.73,235.46 v21.72,228.22
BBEMVO
  Top 0.406: BB.1 88.9,91.44 78.74,81.28 JP-AK.4
BBEMVO1
  Top 1.27: JP7.4 11.18,216.59 REM.2
BBFREQOUT  (via drill 0.6)
  Top 0.406: REM.1 11.09,219.37 v11.18,219.46 | IC11.8 18.94,234.7 | IC11.8 21.91,234.76 26.16,239.27 31.5,239.27 37.34,245.11 37.53,245.36 IC13.1 | v14.22,234.19 14.79,234.76 IC11.8
  Bottom 0.406: v11.18,219.46 14.22,221.23 v14.22,234.19
BBID0  (via drill 0.5)
  Top 0.406: IC1.20 11.68,129.16 16.51,133.99 v18.54,133.99
  Bottom 0.406: v18.54,133.99 20.07,135.51 28.45,135.51 31.24,138.3 31.24,140.59 32.55,141.64 JP3.5
BBID1  (via drill 0.5)
  Top 0.406: v18.29,135.25 16.76,135.25 11.43,129.92 10.24,129.92 IC1.19
  Bottom 0.406: v18.29,135.25 19.56,136.27 28.19,136.27 30.48,138.56 30.48,141.6 33.05,144.18 JP3.6
BBID2  (via drill 0.5)
  Top 0.406: IC5.20 47.88,129.16 52.7,133.99 v54.74,133.99
  Bottom 0.406: v54.74,133.99 56.26,135.51 64.64,135.51 67.44,138.3 67.44,140.59 68.74,141.64 JP4.5
BBID3  (via drill 0.5)
  Top 0.406: v54.48,135.25 52.96,135.25 47.62,129.92 46.43,129.92 IC5.19
  Bottom 0.406: v54.48,135.25 55.75,136.27 64.39,136.27 66.67,138.56 66.67,141.6 69.25,144.18 JP4.6
BBID4  (via drill 0.5)
  Top 0.406: IC7.20 84.07,129.16 88.9,133.99 v90.93,133.99
  Bottom 0.406: v90.93,133.99 92.46,135.51 100.84,135.51 103.63,138.3 103.63,140.59 104.94,141.64 JP5.5
BBID5  (via drill 0.5)
  Top 0.406: v90.68,135.25 89.15,135.25 83.82,129.92 82.63,129.92 IC7.19
  Bottom 0.406: v90.68,135.25 91.95,136.27 100.58,136.27 102.87,138.56 102.87,141.6 105.44,144.18 JP5.6
BBID6  (via drill 0.5)
  Top 0.406: IC9.20 120.27,129.16 125.09,133.99 v127.13,133.99
  Bottom 0.406: v127.13,133.99 128.65,135.51 137.03,135.51 139.83,138.3 139.83,140.59 141.13,141.64 JP6.5
BBID7  (via drill 0.5)
  Top 0.406: v126.87,135.25 125.35,135.25 120.02,129.92 118.82,129.92 IC9.19
  Bottom 0.406: v126.87,135.25 128.14,136.27 136.78,136.27 139.06,138.56 139.06,141.6 141.64,144.18 JP6.6
BBOUT  (via drill 0.6)
  Top 0.406: IC11.43 16.4,226.42 17.27,225.55 19.3,225.55 v19.81,225.04 | v35.31,226.31 v25.15,226.31 | v41.15,231.39 49.02,231.39 49.78,230.63 59.44,230.63 60.45,231.65 60.45,235.21 60.9,235.66
  Top 0.813: COMP2.8 60.51,235.61 60.9,235.66 LED22.A 64.03,235.69 65.02,234.7 65.02,232.23 ROUT.2
  Bottom 0.406: v19.81,225.04 23.88,225.04 v25.15,226.31 | v35.31,226.31 36.07,226.31 v41.15,231.39
BBTRAMP
  Top 0.406: LED21.A 34.09,236.53 35.87,237.54 38.1,239.01 42.67,243.59 44.13,243.59 IC13.2
  Top 0.61: COMP1.8 33.93,234.63 LED21.A
BBTRVO
  Top 0.406: JP-AK.3 76.2,83.82 83.82,91.44 BB.3
BBTRVO1  (via drill 0.6)
  Top 0.406: RTR.1 25.06,228.69 v24.64,228.6 | v8.64,218.44 JP7.3
  Top 0.61: RTR.1 25.94,230.75 COMP1.4
  Bottom 0.406: v24.64,228.6 24.64,227.84 23.37,226.57 18.54,226.57 18.54,219.46 17.53,218.44 v8.64,218.44
BOTID0
  Top 0.406: ROBOTID.4 R4.2
  Bottom 0.406: ROBOTID.4 14.61,62.87 JPB2.10 JPB1.10 41.91,67.31 44.45,64.77 54.61,64.77 55.88,66.04 JP-AK.10 83.82,66.04 85.09,67.31 JPB3.10 JPB4.10
BOTID1
  Top 0.406: ROBOTID.3 12.06,59.05 12.06,63.28 R3.2
  Bottom 0.406: ROBOTID.3 16.51,57.15 16.51,62.87 18.41,64.77 JPB2.11 JPB1.11 41.91,64.77 44.45,62.23 46.99,62.23 48.26,63.5 JP-AK.11 83.82,63.5 85.09,64.77 JPB3.11 JPB4.11
BOTID2  (via drill 0.6)
  Top 0.406: v42.55,62.23 v49.53,62.23 | ROBOTID.2 12.06,53.34 12.06,46.77 R2.2 | v22.86,55.88 22.86,59.69 20.32,62.23 JPB2.12
  Bottom 0.406: JPB2.12 JPB1.12 v42.55,62.23 | v49.53,62.23 60.96,62.23 62.23,60.96 JP-AK.12 83.82,60.96 85.09,62.23 JPB3.12 JPB4.12 | ROBOTID.2 15.24,55.88 v22.86,55.88
BOTID3  (via drill 0.6)
  Top 0.406: v42.55,60.96 43.81,59.69 49.53,59.69 v50.8,60.96 | v21.59,53.34 21.59,58.42 20.32,59.69 JPB2.13 | R1.2 ROBOTID.1
  Bottom 0.406: JPB2.13 JPB1.13 41.27,59.69 v42.55,60.96 | v50.8,60.96 59.69,60.96 62.23,58.42 JP-AK.13 83.82,58.42 85.09,59.69 JPB3.13 JPB4.13 | ROBOTID.1 15.24,52.07 16.51,53.34 v21.59,53.34
BOTID4  (via drill 0.5 pad 0.25)
  Top 0.406: v28.7,139.57 28.7,135.76 23.75,130.81 IC1.38
  Bottom 0.406: JP3.10 31.24,152.18 31.24,143.89 28.7,141.35 v28.7,139.57
BOTID5  (via drill 0.5 pad 0.25)
  Top 0.406: v27.69,138.56 27.69,135.76 23.37,131.44 21.91,131.44 IC1.39
  Bottom 0.406: JP3.11 30.48,153.96 30.48,144.4 27.69,141.6 v27.69,138.56
BOTID6  (via drill 0.5 pad 0.25)
  Top 0.406: IC1.41 22.79,133.16 25.65,136.02 v25.65,138.05
  Bottom 0.406: v25.65,138.05 25.65,142.11 28.96,145.41 28.96,157.51 JP3.13
BOTID7  (via drill 0.5 pad 0.25)
  Top 0.406: v26.67,137.29 26.67,136.02 23.11,132.46 21.91,132.46 IC1.40
  Bottom 0.406: JP3.12 33.31,159.42 29.72,155.83 29.72,144.91 26.67,141.86 v26.67,137.29
BOTID8  (via drill 0.5 pad 0.25)
  Top 0.406: v64.9,139.57 64.9,135.76 59.94,130.81 IC5.38
  Bottom 0.406: JP4.10 67.44,152.18 67.44,143.89 64.9,141.35 v64.9,139.57
BOTID9  (via drill 0.5 pad 0.25)
  Top 0.406: v63.88,138.56 63.88,135.76 59.56,131.44 58.11,131.44 IC5.39
  Bottom 0.406: JP4.11 66.67,153.96 66.67,144.4 63.88,141.6 v63.88,138.56
BOTID10  (via drill 0.5 pad 0.25)
  Top 0.406: IC5.41 58.99,133.16 61.85,136.02 v61.85,138.05
  Bottom 0.406: v61.85,138.05 61.85,142.11 65.15,145.41 65.15,157.51 JP4.13
BOTID11  (via drill 0.5 pad 0.25)
  Top 0.406: v62.87,137.29 62.87,136.02 59.31,132.46 58.1,132.46 IC5.40
  Bottom 0.406: JP4.12 69.5,159.42 65.91,155.83 65.91,144.91 62.87,141.86 v62.87,137.29
BOTID12  (via drill 0.5 pad 0.25)
  Top 0.406: v101.09,139.57 101.09,135.76 96.14,130.81 IC7.38
  Bottom 0.406: JP5.10 103.63,152.18 103.63,143.89 101.09,141.35 v101.09,139.57
BOTID13  (via drill 0.5 pad 0.25)
  Top 0.406: v100.08,138.56 100.08,135.76 95.76,131.44 94.3,131.44 IC7.39
  Bottom 0.406: JP5.11 102.87,153.96 102.87,144.4 100.08,141.6 v100.08,138.56
BOTID14  (via drill 0.5 pad 0.25)
  Top 0.406: IC7.41 95.18,133.16 98.04,136.02 v98.04,138.05
  Bottom 0.406: v98.04,138.05 98.04,142.11 101.35,145.41 101.35,157.51 JP5.13
BOTID15  (via drill 0.5 pad 0.25)
  Top 0.406: v99.06,137.29 99.06,136.02 95.5,132.46 94.3,132.46 IC7.40
  Bottom 0.406: JP5.12 105.7,159.42 102.11,155.83 102.11,144.91 99.06,141.86 v99.06,137.29
BOTID16  (via drill 0.5 pad 0.25)
  Top 0.406: v137.29,139.57 137.29,135.76 132.33,130.81 IC9.38
  Bottom 0.406: JP6.10 139.83,152.18 139.83,143.89 137.29,141.35 v137.29,139.57
BOTID17  (via drill 0.5 pad 0.25)
  Top 0.406: v136.27,138.56 136.27,135.76 131.95,131.44 130.5,131.44 IC9.39
  Bottom 0.406: JP6.11 139.06,153.96 139.06,144.4 136.27,141.6 v136.27,138.56
BOTID18  (via drill 0.5 pad 0.25)
  Top 0.406: IC9.41 131.38,133.16 134.24,136.02 v134.24,138.05
  Bottom 0.406: v134.24,138.05 134.24,142.11 137.54,145.41 137.54,157.51 JP6.13
BOTID19  (via drill 0.5 pad 0.25)
  Top 0.406: v135.25,137.29 135.25,136.02 131.7,132.46 130.49,132.46 IC9.40
  Bottom 0.406: JP6.12 141.89,159.42 138.3,155.83 138.3,144.91 135.25,141.86 v135.25,137.29
BOTID20
  Top 0.406: JP7.10 18.54,221.74 14.99,221.74 12.4,224.33 IC11.38
BOTID21
  Top 0.406: IC11.39 13.2,224.8 15.49,222.5 19.05,222.5 25.65,215.9 27.43,215.9 28.96,214.38 JP7.11
BOTID22
  Top 0.406: IC11.41 14.8,225.23 16,224.03 19.81,224.03 25.91,217.93 30.23,217.93 34.04,214.12 JP7.13
BOTID23
  Top 0.406: IC11.40 14,225.01 15.75,223.27 19.3,223.27 25.65,216.92 28.45,216.92 JP7.12
CA-
  Top 0.61: 25.91,155.57 R11.1 | IC2.11 18.8,153.8 20.57,155.57 25.91,155.57 | 25.91,155.57 R10.2
CA-1
  Top 0.61: 62.1,155.57 R25.1 | IC6.11 54.99,153.8 56.77,155.57 62.1,155.57 | 62.1,155.57 R24.2
CA-2
  Top 0.61: 98.3,155.57 R39.1 | IC8.11 91.19,153.8 92.96,155.57 98.3,155.57 | 98.3,155.57 R38.2
CA-3
  Top 0.61: 134.49,155.57 R51.1 | IC10.11 127.38,153.8 129.16,155.57 134.49,155.57 | 134.49,155.57 R50.2
CAO  (via drill 0.5)
  Top 0.406: IC2.10 17.53,146.69 v17.78,146.18 | v8.64,128.4 10.16,128.4 IC1.21
  Top 0.61: IC2.10 17.53,154.56 19.56,156.59 23.59,156.59 23.59,156.56 24.64,157.61 25.88,157.61 R11.2
  Bottom 0.406: v17.78,146.18 17.78,145.16 11.94,139.32 11.94,131.7 v8.64,128.4
CAO1  (via drill 0.5)
  Top 0.406: IC6.10 53.72,146.69 v53.98,146.18 | v44.83,128.4 46.35,128.4 IC5.21
  Top 0.61: IC6.10 53.72,154.56 55.75,156.59 59.79,156.59 59.79,156.56 60.83,157.61 62.08,157.61 R25.2
  Bottom 0.406: v53.98,146.18 53.98,145.16 48.13,139.32 48.13,131.7 v44.83,128.4
CAO2  (via drill 0.5)
  Top 0.406: IC8.10 89.92,146.69 v90.17,146.18 | v81.03,128.4 82.55,128.4 IC7.21
  Top 0.61: IC8.10 89.92,154.56 91.95,156.59 95.98,156.59 95.98,156.56 97.03,157.61 98.27,157.61 R39.2
  Bottom 0.406: v90.17,146.18 90.17,145.16 84.33,139.32 84.33,131.7 v81.03,128.4
CAO3  (via drill 0.5)
  Top 0.406: IC10.10 126.11,146.69 v126.36,146.18 | v117.22,128.4 118.75,128.4 IC9.21
  Top 0.61: IC10.10 126.11,154.56 128.14,156.59 132.18,156.59 132.18,156.56 133.22,157.61 134.47,157.61 R51.2
  Bottom 0.406: v126.36,146.18 126.36,145.16 120.52,139.32 120.52,131.7 v117.22,128.4
CAP+  (via drill 0.6)
  Top 0.406: v62.87,50.8 62.23,53.34 62.23,52.07 60.96,50.8
  Top 0.813: R27.2 58.56,19.05 61.13,21.61
  Top 5.08: 60.96,107.95 C3.+
  Top 6.452: 60.96,107.95 60.96,50.8 60.96,22.86 61.13,21.61 C4.+
  Bottom 0.406: v62.87,50.8 65.41,48.26 JP-AK.17
  pour Bottom (isolate 0.61, no thermals): 45.72,113.03 99.06,113.03 99.06,99.69 45.72,99.69
  pour Top (isolate 0.406, rank 2, no thermals): 43.81,43.18 46.99,43.18 60.96,29.21 60.96,67.31 59.69,62.23 46.99,48.26 43.81,48.26
CAP+1
  Top 2.54: 93.6,213.23 93.6,213.49
  pour Top (no thermals): 77.34,221.62 77.34,216.53 92.58,216.53 92.58,212.47 94.61,212.47 94.61,219.58 79.38,219.58 79.38,221.62
CAP+2  (via drill 0.6)
  Top 0.305: JP7.17 44.2,218.44 v42.93,219.71
  Bottom 0.305: v42.93,219.71 42.67,219.71 41.91,220.47
  Bottom 0.406: 41.91,220.47 41.91,220.79 R76.2
CAPV  (via drill 0.6)
  Top 0.406: v9.14,236.22 7.52,236.22 IC11.24 | R70.2 38.7,228.43 37.59,227.33 23.88,227.33 v20.83,231.9
  Top 0.61: R70.2 IC14.8
  Bottom 0.406: v9.14,236.22 15.49,236.22 19.68,231.78 v20.83,231.9
CHARGE
  Bottom 0.61: JP_K.7 49.53,68.58 52.07,71.12 JP-AK.8
CHARGE1
  Top 0.305: 121.54,235.83 U$11.P$3 | 121.54,235.83 121.54,235.84 | 121.54,235.83 122.11,235.26 R63.2